# EAGLE board es_shield (EAGLE 9.6.2)
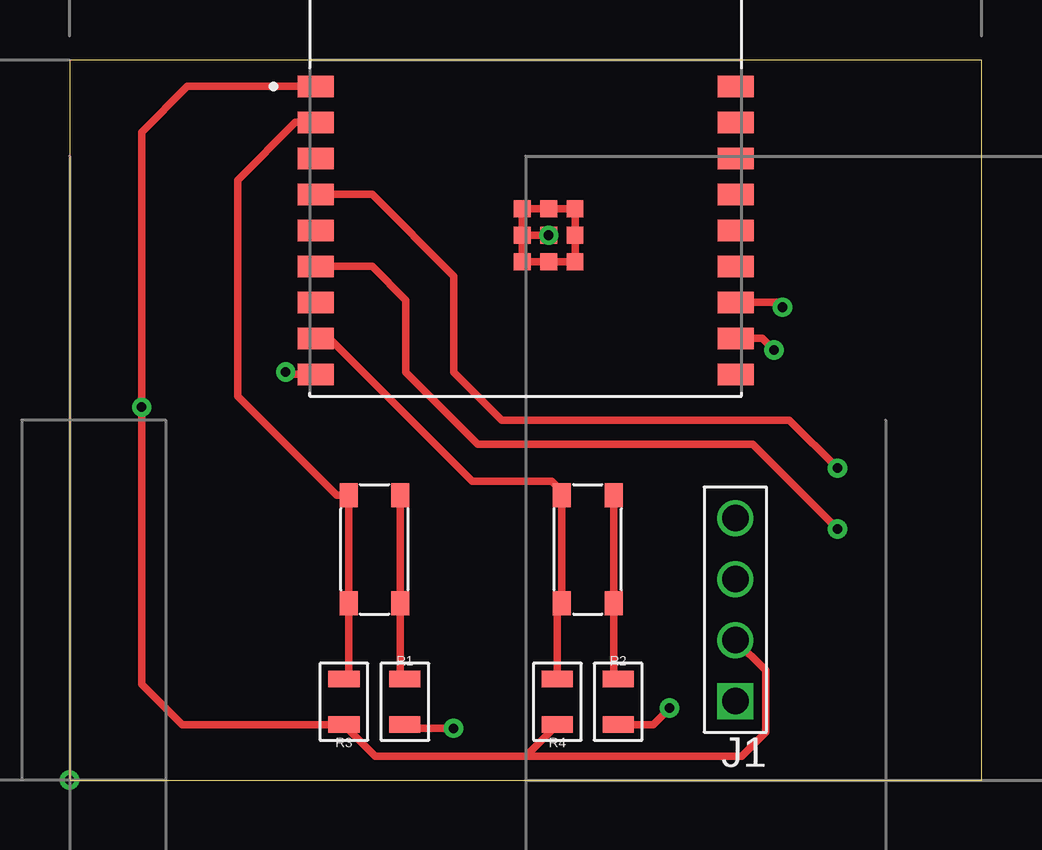
[diagram p0: board, top side]
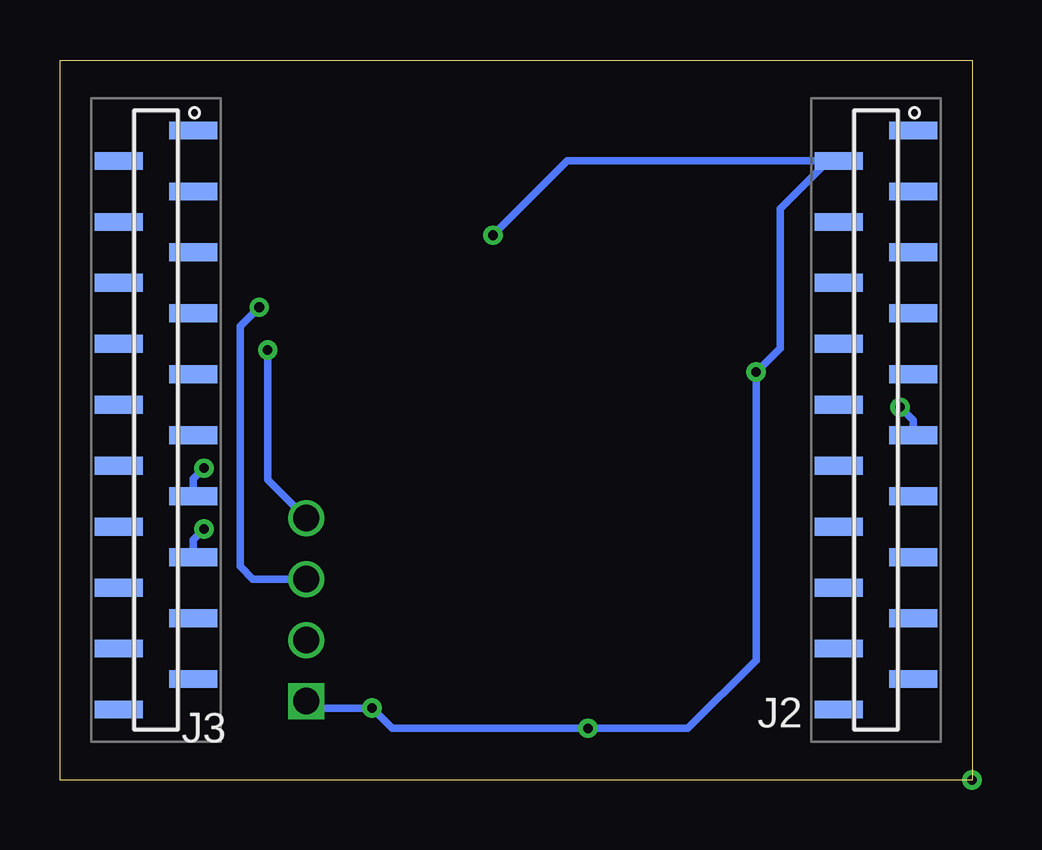
[diagram p1: board, bottom side, seen from below]

Size 38 x 30 mm. Coordinates in mm from the lower left corner, seen from the top.
Outline: 0,0 38,0 38,30 0,30 0,0
Copper layers (1*16): Top 0.035mm / dielectric 1.5mm / Bottom 0.035mm
Design rules "voltera-dru": minimum track width 10mil, minimum drill 0.4mm, track to track 10mil, track to pad 10mil, pad to pad 0.6mm, via to via 0.6mm, smd to smd 0mil, copper to edge 0mil, drill to drill 0.8mm, minimum pad ring 0.2mm, minimum via ring 0.2mm, stop-mask expansion 4mil, vias tented up to drill 0mil, thermal gap 10mil

## Footprints (pad centres in the part's own frame; a part is rotated, then mirrored left to right if it is on the bottom)
4X1_HEADER = drill 1.1 square: 1 0,3.81 | drill 1.1: 2 0,1.27; 3 0,-1.27; 4 0,-3.81
M503142045 = smd 0.74 x 2: 1 -12.065,1.55; 2 -10.795,-1.55; 3 -9.525,1.55; 4 -8.255,-1.55; 5 -6.985,1.55; 6 -5.715,-1.55; 7 -4.445,1.55; 8 -3.175,-1.55; 9 -1.905,1.55; 10 -0.635,-1.55; 11 0.635,1.55; 12 1.905,-1.55; 13 3.175,1.55; 14 4.445,-1.55; 15 5.715,1.55; 16 6.985,-1.55; 17 8.255,1.55; 18 9.525,-1.55; 19 10.795,1.55; 20 12.065,-1.55
0805 = smd 0.7 x 1.3: 1 -0.95,0; 2 0.95,0
TACTILE-SWITCH = smd 1 x 0.75: 1 -2.25,-1.075; 2 2.25,-1.075; 3 -2.25,1.075; 4 2.25,1.075
MODULE_ESP32-C3-WROOM-02-H4 = smd 1.5 x 0.9: 1 -8.75,2.9; 2 -8.75,1.4; 3 -8.75,-0.1; 4 -8.75,-1.6; 5 -8.75,-3.1; 6 -8.75,-4.6; 7 -8.75,-6.1; 8 -8.75,-7.6; 9 -8.75,-9.1; 10 8.75,-9.1; 11 8.75,-7.6; 12 8.75,-6.1; 13 8.75,-4.6; 14 8.75,-3.1; 15 8.75,-1.6; 16 8.75,-0.1; 17 8.75,1.4; 18 8.75,2.9 | smd 0.7 x 0.7: 19 -0.14,-2.2; 20 0.96,-2.2; 21 2.06,-2.2; 22 -0.14,-3.3; 23 0.96,-3.3; 24 2.06,-3.3; 25 -0.14,-4.4; 26 0.96,-4.4; 27 2.06,-4.4

## Placement (x,y rotation side)
J1  MALE_HEADER_4X1  [4X1_HEADER]  27.74,7.1 180 top
J2  M50-3142045  [M503142045]  4,15 270 bottom
J3  M50-3142045  [M503142045]  34,15 270 bottom
R1  [0805]  13.97,3.26 90 top
R2  [0805]  22.86,3.26 90 top
R3  [0805]  11.43,3.26 270 top
R4  [0805]  20.32,3.26 270 top
S1  TACTILE-SWITCH  [TACTILE-SWITCH]  12.7,9.61 90 top
S2  TACTILE-SWITCH  [TACTILE-SWITCH]  21.59,9.61 90 top
U1  ESP32-C3-WROOM-02-H4  [MODULE_ESP32-C3-WROOM-02-H4]  19,26 0 top

## Library data of the parts
J1 R1-R4 S1 S2 = esp32_shield
J2 J3 = esp32_shield; DESCRIPTION: Headers & Wire Housings 20 WAY SIL VERT SMT SKT; HEIGHT: 3.6mm; MANUFACTURER_NAME: Harwin; MANUFACTURER_PART_NUMBER: M50-3142045; MOUSER_PART_NUMBER: 855-M50-3142045; MOUSER_PRICE-STOCK: https://www.mouser.co.uk/ProductDetail/Harwin/M50-3142045/?qs=%252BdQmOuGyFcFpETieNSWjAg%3D%3D
U1 = esp32_shield; MANUFACTURER: Espressif; MAXIMUM_PACKAGE_HEIGHT: 3.35 mm; PARTREV: V1.0; STANDARD: Manufacturer Recommendations

## Nets
3V3: J1.2 J2.11 R3.2 R4.2 U1.1
BOOT: R4.1 S2.3 S2.4 U1.8
EN: R3.1 S1.3 S1.4 U1.2
GND: J1.1 J2.2 R1.1 R2.1 U1.9 U1.19 U1.20 U1.21 U1.22 U1.23 U1.24 U1.25 U1.26 U1.27
MCU_RX: J3.15 U1.6
MCU_TX: J3.13 U1.4
N$3: R1.2 S1.1 S1.2
N$4: R2.2 S2.1 S2.2
RXD: J1.4 U1.11
TXD: J1.3 U1.12

## Tracks (layer width: path | path; a pad name or v marks a point on that pad's centre or on a via)
3V3  (via drill 0.4)
  Top 0.305: U1.1 4.9,28.9 3,27 v3,15.54 3,4 4.69,2.31 R3.2 12.74,1 19.01,1 | R4.2 19.01,1 | 19.01,1 28,1 29,2 29,4.57 J1.2
  Bottom 0.305: J2.11 2.45,14.98 v3,15.54
BOOT
  Top 0.305: U1.8 10.81,18.4 16.77,12.44 20.1,12.44 20.52,12.02 S2.4 S2.3 20.32,7.17 R4.1
EN
  Top 0.305: U1.2 9.4,27.4 7,25 7,16 11.14,11.86 S1.4 S1.3 11.62,4.41 R3.1
GND  (via drill 0.4)
  Top 0.305: U1.9 9.1,16.9 v9,17 | R2.1 24.31,2.31 v25,3 | v16,2.15 14.13,2.15 R1.1 | U1.19 19,23.8 | 19,23.8 U1.20 U1.21 U1.24 U1.27 U1.26 U1.25 U1.22 | U1.22 18.86,23.66 19,23.8 | U1.22 U1.23
  Bottom 0.305: J2.2 6,25.8 | 6,25.8 16.86,25.8 U1.23 | 6,25.8 8,23.8 8,18 v9,17 9,5 11.85,2.15 v16,2.15 24.15,2.15 v25,3 27.45,3 J1.1
  other vias: 19.96,22.7
MCU_RX  (via drill 0.4)
  Top 0.305: v32,10.46 28.45,14 17,14 14,17 14,20 12.6,21.4 U1.6
  Bottom 0.305: J3.15 32.45,10.01 v32,10.46
MCU_TX  (via drill 0.4)
  Top 0.305: U1.4 12.6,24.4 16,21 16,17 18,15 30,15 v32,12.99
  Bottom 0.305: v32,12.99 32.45,12.54 J3.13
N$1  (via drill 0.4)
  other vias: 0,0
N$3
  Top 0.305: S1.2 S1.1 13.78,4.41 R1.2
N$4
  Top 0.305: R2.2 22.66,4.41 S2.1 S2.2
RXD  (via drill 0.4)
  Top 0.305: U1.11 28.86,18.4 v29.35,17.92
  Bottom 0.305: J1.4 29.35,12.52 v29.35,17.92
TXD  (via drill 0.4)
  Top 0.305: U1.12 29.5,19.9 v29.7,19.7
  Bottom 0.305: v29.7,19.7 30.5,18.9 30.5,8.9 29.97,8.37 J1.3